# EAGLE board controll_8motor_dac (EAGLE 9.3.2)
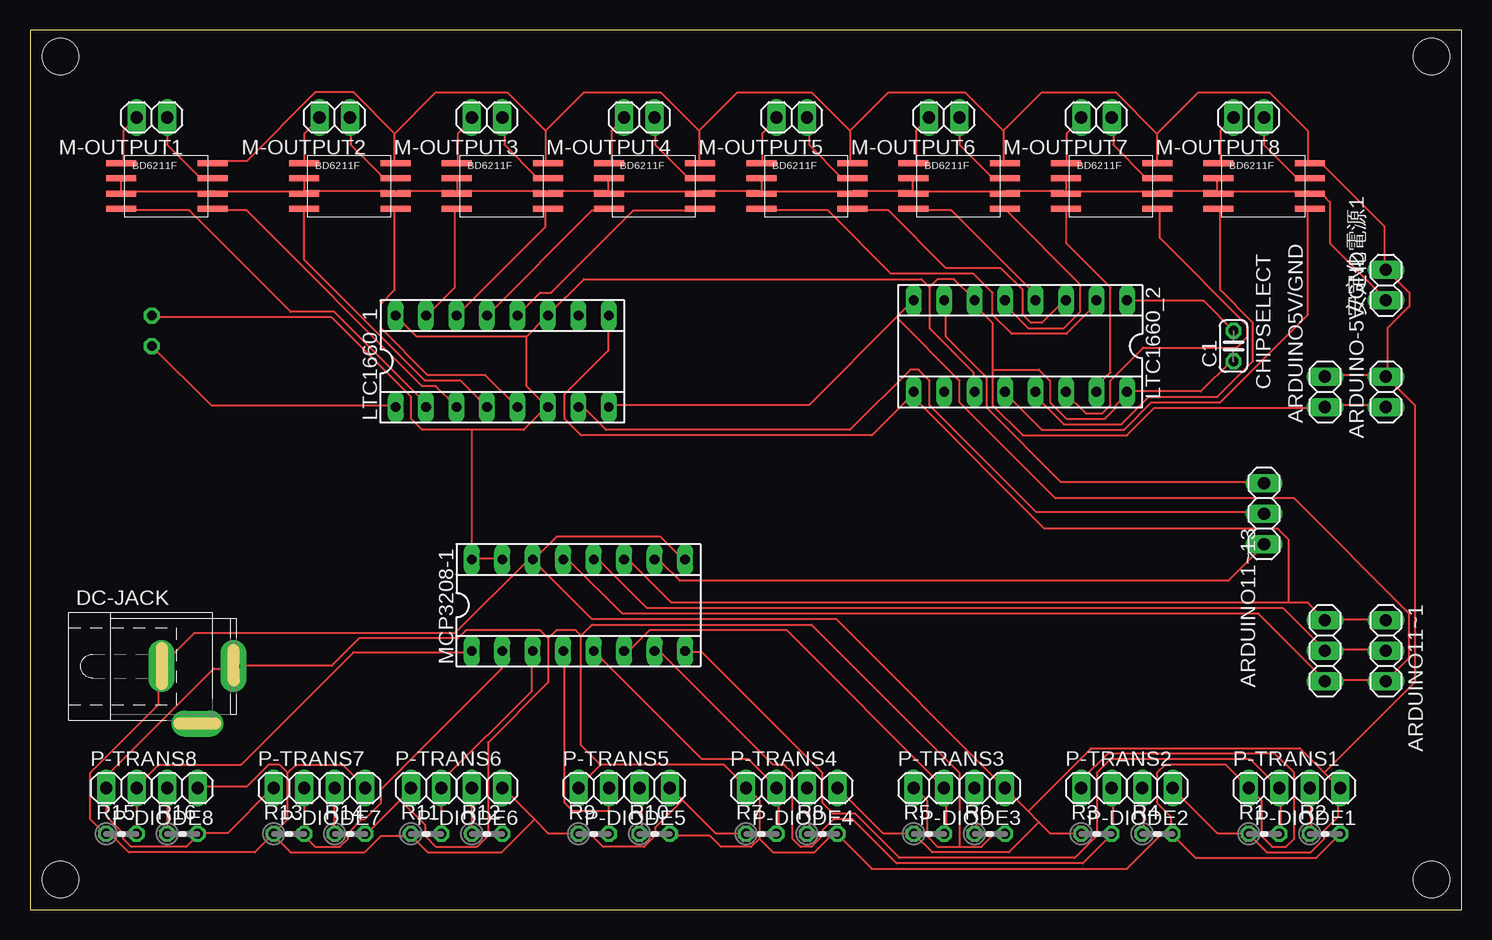
[diagram p0: board, top side]
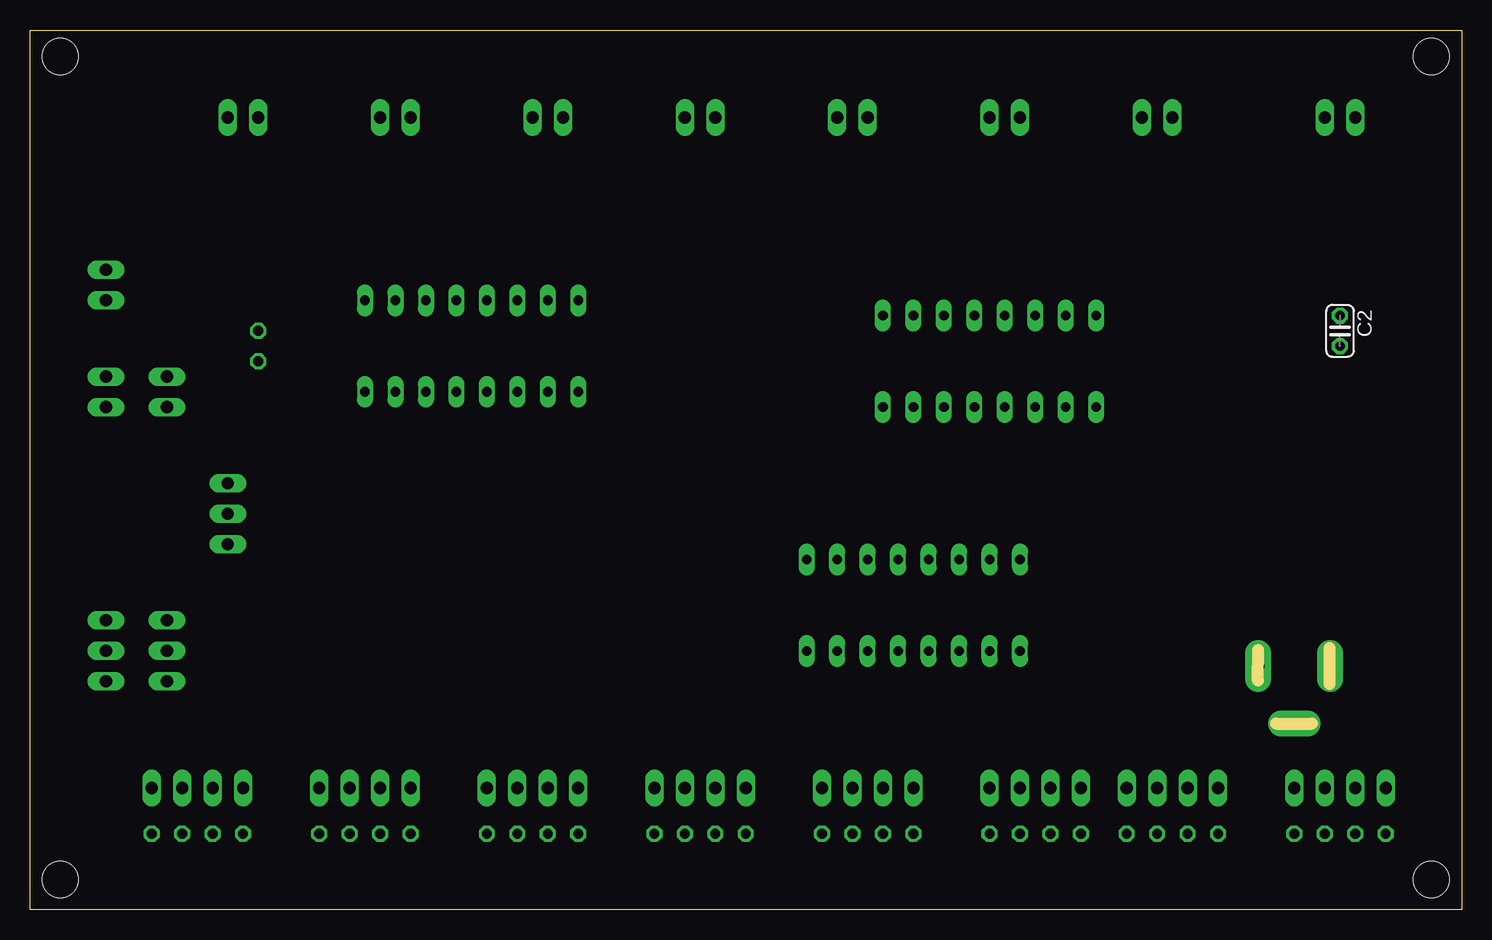
[diagram p1: board, bottom side, seen from below]

Size 119.36 x 73.33 mm. Coordinates in mm from the lower left corner, seen from the top.
Outline: 0,0 119.36,0 119.36,73.33 0,73.33 0,0
Copper layers (1*16): Top 0.035mm / dielectric 1.5mm / Bottom 0.035mm
Design rules "default_12mil": minimum track width 6mil, minimum drill 0.35mm, track to track 12mil, track to pad 12mil, pad to pad 12mil, via to via 12mil, smd to smd 12mil, copper to edge 40mil, drill to drill 6mil, minimum pad ring 10mil, minimum via ring 8mil, stop-mask expansion 4mil, vias tented up to drill 0mil, thermal gap 12mil
Net classes: 0 default: clearance 0.205 mm
Holes 3 mm at 2.54,71.12 116.84,71.12 116.84,2.54 2.54,2.54

## Footprints (pad centres in the part's own frame; a part is rotated, then mirrored left to right if it is on the bottom)
1X02 = drill 1.016 long: 1 -1.27,0; 2 1.27,0
1X03 = drill 1.016 long: 1 -2.54,0; 2 0,0; 3 2.54,0
C025-024X044 = drill 0.813 octagon: 1 -1.27,0; 2 1.27,0
SPC4077 = drill 0.8 pad 2.184 long: 1 -3,0; 2 0,-4.8 | drill 1 pad 2.184 long: 3 3,0
SOCKET-16 = drill 0.813 long: 1 -8.89,-3.81; 2 -6.35,-3.81; 3 -3.81,-3.81; 4 -1.27,-3.81; 5 1.27,-3.81; 6 3.81,-3.81; 7 6.35,-3.81; 8 8.89,-3.81; 9 8.89,3.81; 10 6.35,3.81; 11 3.81,3.81; 12 1.27,3.81; 13 -1.27,3.81; 14 -3.81,3.81; 15 -6.35,3.81; 16 -8.89,3.81
BD6211F-E2 = smd 2.5 x 0.5: 1 -2.54,2.54; 2 -2.54,1.27; 3 -2.54,0; 4 -2.54,-1.27; 5 5.07,-1.27; 6 5.07,0; 7 5.07,1.27; 8 5.07,2.54
0204V = drill 0.813 octagon: 1 -1.27,0; 2 1.27,0

## Placement (x,y rotation side)
ARDUINO5V/GND  [1X02]  107.95,43.18 90 top
ARDUINO11~1  [1X03]  113.03,21.59 270 top
ARDUINO11~13  [1X03]  107.95,21.59 270 top
ARDUINO-5V/GND  [1X02]  113.03,43.18 90 top
C1  0.1uF  [C025-024X044]  100.33,46.99 90 top
C2  0.1uF  [C025-024X044]  10.16,48.26 270 bottom
CHIPSELECT  [1X03]  102.87,33.02 270 top
DC-JACK  [SPC4077]  13.97,20.32 0 top
LTC1660_1  [SOCKET-16]  39.37,45.72 0 top
LTC1660_2  [SOCKET-16]  82.55,46.99 180 top
M-DRIVER_1  BD6211F-E2  [BD6211F-E2]  10.16,59.69 0 top
M-DRIVER_2  BD6211F-E2  [BD6211F-E2]  25.4,59.69 0 top
M-DRIVER_3  BD6211F-E2  [BD6211F-E2]  38.1,59.69 0 top
M-DRIVER_4  BD6211F-E2  [BD6211F-E2]  50.8,59.69 0 top
M-DRIVER_5  BD6211F-E2  [BD6211F-E2]  63.5,59.69 0 top
M-DRIVER_6  BD6211F-E2  [BD6211F-E2]  76.2,59.69 0 top
M-DRIVER_7  BD6211F-E2  [BD6211F-E2]  88.9,59.69 0 top
M-DRIVER_8  BD6211F-E2  [BD6211F-E2]  101.6,59.69 0 top
M-OUTPUT1  [1X02]  10.16,66.04 180 top
M-OUTPUT2  [1X02]  25.4,66.04 180 top
M-OUTPUT3  [1X02]  38.1,66.04 180 top
M-OUTPUT4  [1X02]  50.8,66.04 180 top
M-OUTPUT5  [1X02]  63.5,66.04 180 top
M-OUTPUT6  [1X02]  76.2,66.04 180 top
M-OUTPUT7  [1X02]  88.9,66.04 180 top
M-OUTPUT8  [1X02]  101.6,66.04 180 top
MCP3208‐1  [SOCKET-16]  45.72,25.4 0 top
P-DIODE1  [1X02]  107.95,10.16 180 top
P-DIODE2  [1X02]  93.98,10.16 180 top
P-DIODE3  [1X02]  80.01,10.16 180 top
P-DIODE4  [1X02]  66.04,10.16 180 top
P-DIODE5  [1X02]  52.07,10.16 180 top
P-DIODE6  [1X02]  38.1,10.16 180 top
P-DIODE7  [1X02]  26.67,10.16 180 top
P-DIODE8  [1X02]  12.7,10.16 180 top
P-TRANS1  [1X02]  102.87,10.16 0 top
P-TRANS2  [1X02]  88.9,10.16 0 top
P-TRANS3  [1X02]  74.93,10.16 0 top
P-TRANS4  [1X02]  60.96,10.16 0 top
P-TRANS5  [1X02]  46.99,10.16 0 top
P-TRANS6  [1X02]  33.02,10.16 0 top
P-TRANS7  [1X02]  21.59,10.16 0 top
P-TRANS8  [1X02]  7.62,10.16 0 top
R1  2.2K  [0204V]  102.87,6.35 0 top
R2  240  [0204V]  107.95,6.35 0 top
R3  2.2K  [0204V]  88.9,6.35 0 top
R4  240  [0204V]  93.98,6.35 0 top
R5  2.2K  [0204V]  74.93,6.35 0 top
R6  240  [0204V]  80.01,6.35 0 top
R7  2.2K  [0204V]  60.96,6.35 0 top
R8  240  [0204V]  66.04,6.35 0 top
R9  2.2K  [0204V]  46.99,6.35 0 top
R10  240  [0204V]  52.07,6.35 0 top
R11  2.2K  [0204V]  33.02,6.35 0 top
R12  240  [0204V]  38.1,6.35 0 top
R13  2.2K  [0204V]  21.59,6.35 0 top
R14  240  [0204V]  26.67,6.35 0 top
R15  2.2K  [0204V]  7.62,6.35 0 top
R16  240  [0204V]  12.7,6.35 0 top
安定化電源1  [1X02]  113.03,52.07 90 top

## Library data of the parts
ARDUINO5V/GND ARDUINO11~1 ARDUINO11~13 ARDUINO-5V/GND CHIPSELECT M-OUTPUT1-M-OUTPUT8 P-DIODE1-P-DIODE8 P-TRANS1-P-TRANS8 安定化電源1 = pinhead
C1 C2 = rcl; SPICEPREFIX: C
DC-JACK = BD6211F; OC_FARNELL: unknown; OC_NEWARK: unknown
LTC1660_1 LTC1660_2 MCP3208‐1 = ic-package
M-DRIVER_1-M-DRIVER_8 = BD6211F
R1-R16 = rcl; SPICEPREFIX: R

## Nets
ARDUINO-5V/GND: ARDUINO5V/GND.1 ARDUINO-5V/GND.1 C1.1 C2.1 LTC1660_1.6 LTC1660_1.11 LTC1660_1.16 LTC1660_2.6 LTC1660_2.11 LTC1660_2.16 MCP3208‐1.15 MCP3208‐1.16
N$1: LTC1660_1.12 M-DRIVER_4.5
N$2: M-DRIVER_4.1 M-OUTPUT4.2
N$3: LTC1660_1.13 M-DRIVER_4.4
N$4: LTC1660_1.15 M-DRIVER_3.4
N$5: LTC1660_2.12 M-DRIVER_8.5
N$6: LTC1660_2.13 M-DRIVER_8.4
N$7: LTC1660_2.14 M-DRIVER_7.5
N$8: LTC1660_2.15 M-DRIVER_7.4
N$9: LTC1660_1.5 M-DRIVER_2.5
N$10: LTC1660_1.4 M-DRIVER_2.4
N$11: LTC1660_1.3 M-DRIVER_1.5
N$12: LTC1660_1.2 M-DRIVER_1.4
N$13: M-DRIVER_5.1 M-OUTPUT5.2
N$14: LTC1660_2.4 M-DRIVER_6.4
N$15: LTC1660_2.3 M-DRIVER_5.5
N$16: LTC1660_2.2 M-DRIVER_5.4
N$17: M-DRIVER_4.7 M-OUTPUT4.1
N$18: M-DRIVER_3.7 M-OUTPUT3.1
N$19: M-DRIVER_3.1 M-OUTPUT3.2
N$20: M-DRIVER_8.7 M-OUTPUT8.1
N$21: M-DRIVER_8.1 M-OUTPUT8.2
N$22: M-DRIVER_7.7 M-OUTPUT7.1
N$23: M-DRIVER_7.1 M-OUTPUT7.2
N$24: M-DRIVER_1.7 M-OUTPUT1.1
N$25: ARDUINO11~1.1 ARDUINO11~13.1 LTC1660_1.9 LTC1660_2.9 MCP3208‐1.11
N$26: LTC1660_1.14 M-DRIVER_3.5
N$27: M-DRIVER_2.7 M-OUTPUT2.1
N$28: M-DRIVER_2.1 M-OUTPUT2.2
N$29: LTC1660_2.5 M-DRIVER_6.5
N$30: M-DRIVER_5.7 M-OUTPUT5.1
N$31: M-DRIVER_6.1 M-OUTPUT6.2
N$32: M-DRIVER_6.7 M-OUTPUT6.1
N$33: M-DRIVER_1.2 M-DRIVER_1.3 M-DRIVER_1.6 M-DRIVER_2.2 M-DRIVER_2.3 M-DRIVER_2.6 M-DRIVER_3.2 M-DRIVER_3.3 M-DRIVER_3.6 M-DRIVER_4.2 M-DRIVER_4.3 M-DRIVER_4.6 M-DRIVER_5.2 M-DRIVER_5.3 M-DRIVER_5.6 M-DRIVER_6.2 M-DRIVER_6.3 M-DRIVER_6.6 M-DRIVER_7.2 M-DRIVER_7.3 M-DRIVER_7.6 M-DRIVER_8.2 M-DRIVER_8.3 M-DRIVER_8.6 安定化電源1.1
N$34: C2.2 LTC1660_1.1
N$35: C1.2 LTC1660_2.1
N$38: ARDUINO11~1.3 ARDUINO11~13.3 LTC1660_1.8 LTC1660_2.8 MCP3208‐1.13
N$39: CHIPSELECT.2 LTC1660_1.7
N$40: M-DRIVER_1.1 M-OUTPUT1.2
N$41: CHIPSELECT.1 LTC1660_2.7
N$42: ARDUINO11~1.2 ARDUINO11~13.2 MCP3208‐1.12
N$43: P-DIODE8.2 R16.1
N$44: CHIPSELECT.3 MCP3208‐1.10
N$45: P-DIODE7.2 R14.1
N$46: P-DIODE6.2 R12.1
N$47: P-DIODE5.2 R10.1
N$48: P-DIODE4.2 R8.1
N$49: P-DIODE3.2 R6.1
N$50: P-DIODE2.2 R4.1
N$51: P-DIODE1.2 R2.1
N$52: MCP3208‐1.7 P-TRANS2.2 R3.2
N$53: MCP3208‐1.8 P-TRANS1.2 R1.2
N$54: MCP3208‐1.6 P-TRANS3.2 R5.2
N$55: MCP3208‐1.5 P-TRANS4.2 R7.2
N$56: MCP3208‐1.4 P-TRANS5.2 R9.2
N$57: MCP3208‐1.3 P-TRANS6.2 R11.2
N$58: MCP3208‐1.2 P-TRANS7.2 R13.2
N$59: MCP3208‐1.1 P-TRANS8.2 R15.2
N$97: DC-JACK.3 P-TRANS1.1 P-TRANS2.1 P-TRANS3.1 P-TRANS4.1 P-TRANS5.1 P-TRANS6.1 P-TRANS7.1 P-TRANS8.1 R2.2 R4.2 R6.2 R8.2 R10.2 R12.2 R14.2 R16.2
P-DIORD1: ARDUINO5V/GND.2 ARDUINO-5V/GND.2 DC-JACK.1 M-DRIVER_1.8 M-DRIVER_2.8 M-DRIVER_3.8 M-DRIVER_4.8 M-DRIVER_5.8 M-DRIVER_6.8 M-DRIVER_7.8 M-DRIVER_8.8 MCP3208‐1.9 MCP3208‐1.14 P-DIODE1.1 P-DIODE2.1 P-DIODE3.1 P-DIODE4.1 P-DIODE5.1 P-DIODE6.1 P-DIODE7.1 P-DIODE8.1 R1.1 R3.1 R5.1 R7.1 R9.1 R11.1 R13.1 R15.1 安定化電源1.2

## Tracks (layer width: path | path; a pad name or v marks a point on that pad's centre or on a via)
ARDUINO-5V/GND
  Top 0.152: C1.1 100.13,45.72 97.61,43.2 91.44,43.2 LTC1660_2.16 91.44,42.98 90.53,42.06 90.53,41.83 89.61,40.92 86.41,40.92 85.04,42.29 85.04,44.12 84.12,45.03 80.24,45.03 | ARDUINO-5V/GND.1 112.93,42.06 108.1,42.06 ARDUINO5V/GND.1 107.87,41.83 93.73,41.83 91.44,39.55 82.75,39.55 80.24,42.06 80.24,45.03 | 74.98,51.89 74.98,48.46 78.64,44.81 78.64,43.2 LTC1660_2.11 | 74.98,51.89 75.67,52.58 77.04,52.58 78.64,50.98 LTC1660_2.6 78.87,50.75 78.87,50.29 80.24,48.92 80.24,45.03 | LTC1660_1.16 32.23,47.78 41.38,47.78 | 41.38,47.78 42.98,49.38 LTC1660_1.11 43.2,49.61 46.18,52.58 74.3,52.58 74.98,51.89 | MCP3208‐1.15 39.32,29.26 37.03,29.26 MCP3208‐1.16 36.8,29.26 36.8,40.01 | 36.8,40.01 41.15,40.01 42.98,41.83 LTC1660_1.6 42.98,42.06 41.38,43.66 41.38,47.78 | 36.8,40.01 32.69,40.01 31.77,40.92 31.77,42.75 25.15,49.38 10.29,49.38 C2.1
N$1
  Top 0.152: M-DRIVER_4.5 55.78,58.29 50.29,58.29 43.43,51.44 42.52,51.44 40.69,49.61 LTC1660_1.12
N$2
  Top 0.152: M-DRIVER_4.1 48.46,62.41 48.46,64.92 49.38,65.84 M-OUTPUT4.2
N$3
  Top 0.152: LTC1660_1.13 46.86,58.29 48.23,58.29 M-DRIVER_4.4
N$4
  Top 0.152: M-DRIVER_3.4 35.43,58.29 35.43,51.89 33.15,49.61 LTC1660_1.15
N$5
  Top 0.152: M-DRIVER_8.5 106.53,58.29 106.53,49.61 99.21,42.29 93.5,42.29 91.21,40.01 84.35,40.01 81.38,42.98 LTC1660_2.12
N$6
  Top 0.152: M-DRIVER_8.4 99.21,58.29 99.21,51.66 101.96,48.92 101.96,45.72 98.98,42.75 93.27,42.75 90.98,40.46 86.18,40.46 83.67,42.98 LTC1660_2.13
N$7
  Top 0.152: M-DRIVER_7.5 94.18,58.29 94.18,56.01 101.5,48.69 101.5,47.78 100.58,46.86 92.81,46.86 90.07,44.12 90.07,42.06 89.38,41.38 88.01,41.38 86.41,42.98 LTC1660_2.14
N$8
  Top 0.152: M-DRIVER_7.4 86.41,58.29 86.41,55.55 90.07,51.89 90.07,44.81 88.92,43.66 88.92,43.2 LTC1660_2.15
N$9
  Top 0.152: M-DRIVER_2.5 30.4,58.29 30.4,51.66 29.26,50.52 29.26,48.46 33.15,44.58 37.95,44.58 40.46,42.06 LTC1660_1.5
N$10
  Top 0.152: M-DRIVER_2.4 22.86,54.18 32.92,44.12 35.89,44.12 LTC1660_1.4
N$11
  Top 0.152: M-DRIVER_1.5 15.32,58.29 18.06,58.29 32.69,43.66 33.83,43.66 35.43,42.06 LTC1660_1.3
N$12
  Top 0.152: M-DRIVER_1.4 7.77,58.29 13.26,58.29 21.72,49.84 25.38,49.84 33.15,42.06 LTC1660_1.2
N$13
  Top 0.152: M-DRIVER_5.1 61.04,62.41 61.04,64.69 62.18,65.84 M-OUTPUT5.2
N$14
  Top 0.152: M-DRIVER_6.4 73.84,58.29 76.81,58.29 83.67,51.44 83.67,50.98 LTC1660_2.4
N$15
  Top 0.152: M-DRIVER_5.5 68.58,58.29 71.55,58.29 76.35,53.49 80.92,53.49 82.75,51.66 82.75,49.61 83.44,48.92 84.35,48.92 86.18,50.75 LTC1660_2.3
N$16
  Top 0.152: M-DRIVER_5.4 61.04,58.29 66.52,58.29 71.78,53.03 78.64,53.03 80.24,51.44 80.24,49.61 81.84,48.01 86.41,48.01 88.7,50.29 88.7,50.75 LTC1660_2.2
N$17
  Top 0.152: M-DRIVER_4.7 55.78,61.04 54.86,61.04 52.12,63.78 52.12,65.84 M-OUTPUT4.1
N$18
  Top 0.152: M-DRIVER_3.7 42.98,61.04 42.29,61.04 39.55,63.78 39.55,65.84 M-OUTPUT3.1
N$19
  Top 0.152: M-DRIVER_3.1 35.66,62.41 35.66,64.69 36.8,65.84 M-OUTPUT3.2
N$20
  Top 0.152: M-OUTPUT8.1 102.87,63.78 105.61,61.04 106.53,61.04 M-DRIVER_8.7
N$21
  Top 0.152: M-OUTPUT8.2 99.21,64.92 99.21,62.41 M-DRIVER_8.1
N$22
  Top 0.152: M-DRIVER_7.7 93.95,61.04 93.04,61.04 90.3,63.78 90.3,65.84 M-OUTPUT7.1
N$23
  Top 0.152: M-DRIVER_7.1 86.41,62.41 86.41,64.69 87.55,65.84 M-OUTPUT7.2
N$24
  Top 0.152: M-OUTPUT1.1 11.43,63.78 14.17,61.04 15.09,61.04 M-DRIVER_1.7
N$25
  Top 0.152: LTC1660_1.9 48.23,49.38 48.23,46.63 44.58,42.98 44.58,40.92 45.95,39.55 70.18,39.55 73.61,42.98 LTC1660_2.9 73.84,42.98 73.84,42.52 84.58,31.77 104.01,31.77 104.93,30.86 104.93,25.6 | 104.93,25.6 106.53,25.6 107.9,24.23 ARDUINO11~13.1 108.13,24.23 112.93,24.23 ARDUINO11~1.1 | 104.93,25.6 53.49,25.6 50.06,29.03 49.61,29.03 MCP3208‐1.11
N$26
  Top 0.152: M-DRIVER_3.5 42.98,58.29 42.98,56.92 35.66,49.61 LTC1660_1.14
N$27
  Top 0.152: M-DRIVER_2.7 30.4,61.04 29.49,61.04 26.75,63.78 26.75,65.84 M-OUTPUT2.1
N$28
  Top 0.152: M-DRIVER_2.1 22.86,64.69 24,65.84 M-OUTPUT2.2
N$29
  Top 0.152: M-DRIVER_6.5 81.38,58.29 87.55,52.12 87.55,49.84 86.18,48.46 83.21,48.46 81.38,50.29 81.38,50.75 LTC1660_2.5
N$30
  Top 0.152: M-DRIVER_5.7 68.35,61.04 67.67,61.04 64.92,63.78 64.92,65.84 M-OUTPUT5.1
N$31
  Top 0.152: M-DRIVER_6.1 73.84,62.41 73.84,64.92 74.75,65.84 M-OUTPUT6.2
N$32
  Top 0.152: M-DRIVER_6.7 81.15,61.04 80.24,61.04 77.5,63.78 77.5,65.84 M-OUTPUT6.1
N$33
  Top 0.152: 98.98,59.89 94.18,59.89 M-DRIVER_7.6 93.95,59.89 86.41,59.89 | 98.98,59.89 98.98,60.81 M-DRIVER_8.2 | 98.98,59.89 M-DRIVER_8.3 99.21,59.89 106.53,59.89 M-DRIVER_8.6 106.76,59.66 107.67,59.66 108.36,58.98 108.36,55.55 112.93,50.98 安定化電源1.1 | M-DRIVER_2.2 22.86,59.89 | M-DRIVER_1.2 7.54,60.81 7.54,59.89 M-DRIVER_1.3 7.77,59.89 15.09,59.89 M-DRIVER_1.6 15.32,59.89 22.86,59.89 | 86.41,59.89 86.41,60.81 M-DRIVER_7.2 | 73.61,59.89 68.58,59.89 M-DRIVER_5.6 68.35,59.89 61.04,59.89 | 73.61,59.89 73.61,60.81 M-DRIVER_6.2 | 73.61,59.89 M-DRIVER_6.3 73.84,59.89 81.15,59.89 M-DRIVER_6.6 81.38,59.89 86.18,59.89 M-DRIVER_7.3 86.41,59.89 | 61.04,59.89 61.04,60.81 M-DRIVER_5.2 | 35.66,59.89 35.66,60.81 M-DRIVER_3.2 | 48.23,59.89 43.2,59.89 M-DRIVER_3.6 42.98,59.89 35.66,59.89 | 48.23,59.89 48.23,60.81 M-DRIVER_4.2 | 48.23,59.89 M-DRIVER_4.3 48.46,59.89 55.78,59.89 M-DRIVER_4.6 56.01,59.89 60.81,59.89 M-DRIVER_5.3 61.04,59.89 | 35.66,59.89 M-DRIVER_3.3 35.43,59.89 30.63,59.89 M-DRIVER_2.6 30.4,59.89 22.86,59.89 | 22.86,59.89 M-DRIVER_2.3
N$34
  Top 0.152: C2.2 15.09,42.06 30.4,42.06 LTC1660_1.1
N$35
  Top 0.152: C1.2 97.84,50.75 91.44,50.75 LTC1660_2.1
N$38
  Top 0.152: LTC1660_2.8 72.24,49.38 | 72.24,49.38 64.92,42.06 48.46,42.06 LTC1660_1.8 | MCP3208‐1.13 44.58,29.03 45.03,29.03 49.38,24.69 102.41,24.69 107.9,19.2 ARDUINO11~13.3 108.13,19.2 112.93,19.2 ARDUINO11~1.3 113.16,19.2 114.99,21.03 114.99,24.69 105.39,34.29 85.5,34.29 77.5,42.29 77.5,44.12 72.24,49.38
N$39
  Top 0.152: LTC1660_1.7 45.72,41.83 46.18,41.83 48.01,40.01 68.35,40.01 73.38,45.03 74.07,45.03 74.98,44.12 74.98,42.06 83.9,33.15 102.87,33.15 CHIPSELECT.2
N$40
  Top 0.152: M-OUTPUT1.2 7.77,64.92 7.77,62.41 M-DRIVER_1.1
N$41
  Top 0.152: LTC1660_2.7 76.35,50.75 76.35,47.78 79.78,44.35 79.78,41.83 85.95,35.66 102.87,35.66 CHIPSELECT.1
N$42
  Top 0.152: MCP3208‐1.12 47.09,29.03 47.55,29.03 51.44,25.15 104.47,25.15 107.9,21.72 ARDUINO11~13.2 108.13,21.72 112.93,21.72 ARDUINO11~1.2
N$43
  Top 0.152: P-DIODE8.2 R16.1
N$44
  Top 0.152: MCP3208‐1.10 52.12,29.03 52.58,29.03 54.18,27.43 99.9,27.43 102.87,30.4 CHIPSELECT.3
N$45
  Top 0.152: R14.1 25.38,6.4 25.38,10.06 P-DIODE7.2
N$46
  Top 0.152: R12.1 36.8,6.4 36.8,10.06 P-DIODE6.2
N$47
  Top 0.152: R10.1 50.98,6.4 50.98,10.06 P-DIODE5.2
N$48
  Top 0.152: R8.1 64.92,6.4 64.92,10.06 P-DIODE4.2
N$49
  Top 0.152: R6.1 78.87,6.4 78.87,10.06 P-DIODE3.2
N$50
  Top 0.152: R4.1 92.81,6.4 92.81,10.06 P-DIODE2.2
N$51
  Top 0.152: R2.1 106.76,6.4 106.76,10.06 P-DIODE1.2
N$52
  Top 0.152: MCP3208‐1.7 52.12,21.49 52.58,21.49 61.95,12.12 62.87,12.12 63.55,11.43 63.55,5.94 64.24,5.26 65.15,5.26 66.06,6.17 66.06,6.63 66.98,7.54 68.58,7.54 72.24,3.89 87.78,3.89 90.07,6.17 R3.2 90.3,6.4 90.3,10.06 P-TRANS2.2
N$53
  Top 0.152: R1.2 104.24,6.4 104.24,10.06 P-TRANS1.2 101.73,12.57 90.07,12.57 88.92,11.43 88.92,6.17 87.1,4.34 72.47,4.34 68.81,8 66.98,8 66.06,8.91 66.06,11.43 56.01,21.49 54.63,21.49 MCP3208‐1.8
N$54
  Top 0.152: R5.2 76.35,6.4 76.35,10.06 P-TRANS3.2 76.12,10.29 63.09,23.32 51.66,23.32 50.06,21.72 49.61,21.72 MCP3208‐1.6
N$55
  Top 0.152: MCP3208‐1.5 56.01,12.57 59.89,12.57 62.18,10.29 P-TRANS4.2 62.41,10.06 62.41,6.4 R7.2
N$56
  Top 0.152: 48.23,8.23 48.23,10.06 P-TRANS5.2 | 48.23,8.23 48.23,6.4 R9.2 | 48.23,8.23 45.26,8.23 44.58,8.91 44.58,21.49 MCP3208‐1.4
N$57
  Top 0.152: R11.2 P-TRANS6.2 34.29,10.74 41.83,18.29 41.83,21.49 MCP3208‐1.3
N$58
  Top 0.152: P-TRANS7.2 R13.2 22.86,6.17 23.77,5.26 25.83,5.26 26.52,5.94 26.52,6.4 27.66,7.54 27.89,7.54 29.26,8.91 29.26,10.06 39.32,20.12 39.32,21.49 MCP3208‐1.2
N$59
  Top 0.152: R15.2 8.91,6.4 8.91,10.06 P-TRANS8.2 8.91,10.29 10.74,12.12 17.6,12.12 26.98,21.49 36.8,21.49 MCP3208‐1.1
N$97
  Top 0.152: P-TRANS7.1 20.12,10.06 16.46,6.4 14.17,6.4 R16.2 13.95,6.17 13.03,5.26 8.46,5.26 7.77,5.94 7.77,6.4 6.4,7.77 6.4,10.06 P-TRANS8.1 6.4,10.29 6.4,11.2 15.32,20.12 16.92,20.12 DC-JACK.3 17.14,20.34 25.15,20.34 27.43,22.63 35.66,22.63 36.35,23.32 42.52,23.32 43.2,22.63 | R4.2 95.1,6.4 95.1,7.77 93.95,8.91 93.95,11.43 94.64,12.12 99.67,12.12 101.5,10.29 P-TRANS1.1 101.73,10.06 102.64,9.14 102.64,6.17 103.56,5.26 104.7,5.26 105.39,5.94 105.39,11.43 103.78,13.03 89.84,13.03 87.78,10.97 87.78,10.29 P-TRANS2.1 | R2.2 107.21,4.34 97.16,4.34 95.33,6.17 R4.2 | 30.86,9.14 31.77,10.06 P-TRANS6.1 | 30.86,9.14 28.12,6.4 R14.2 | 38.18,6.17 39.32,6.17 R12.2 | 38.18,6.17 37.26,5.26 33.83,5.26 32.92,6.17 32.92,7.09 30.86,9.14 | 77.5,5.26 75.67,5.26 74.75,6.17 74.75,9.14 73.84,10.06 P-TRANS3.1 | 77.5,5.26 79.32,5.26 80.24,6.17 81.15,6.17 R6.2 | 60.81,5.94 60.12,5.26 57.61,5.26 56.69,6.17 53.49,6.17 R10.2 | 60.81,5.94 60.81,9.14 59.89,10.06 P-TRANS4.1 59.66,10.29 57.84,12.12 47.55,12.12 | 60.81,5.94 61.95,4.8 65.38,4.8 66.75,6.17 67.21,6.17 R8.2 67.44,6.17 70.18,3.43 91.44,3.43 94.18,6.17 95.1,6.17 R4.2 | 47.55,12.12 45.72,10.29 P-TRANS5.1 | 77.5,5.26 77.5,11.43 65.15,23.77 46.86,23.77 45.95,22.86 | 45.95,22.86 45.95,13.72 47.55,12.12 | 38.18,6.17 38.18,13.95 43.2,18.97 43.2,22.63 | 43.2,22.63 43.89,23.32 45.49,23.32 45.95,22.86
P-DIORD1
  Top 0.152: 42.06,7.54 39.55,10.06 P-DIODE6.1 | 42.06,7.54 43.2,6.4 45.72,6.4 R9.1 45.72,6.17 46.86,6.17 47.78,5.26 51.21,5.26 52.12,6.17 52.12,6.86 54.41,9.14 | 54.41,9.14 53.49,10.06 P-DIODE5.1 | 54.41,9.14 57.15,6.4 59.66,6.4 R7.1 | MCP3208‐1.14 42.06,29.26 43.89,31.09 52.58,31.09 54.41,29.26 MCP3208‐1.9 | R13.1 20.12,6.17 18.75,4.8 8.23,4.8 6.86,6.17 6.4,6.17 R15.1 6.17,6.4 5.03,7.54 5.03,11.43 10.74,17.14 10.74,20.12 DC-JACK.1 10.97,20.34 13.72,23.09 35.43,23.09 41.38,29.03 41.83,29.03 MCP3208‐1.14 | R13.1 20.34,6.17 21.72,4.8 27.89,4.8 29.26,6.17 31.55,6.17 R11.1 31.77,6.17 33.15,4.8 39.32,4.8 42.06,7.54 | 21.49,11.43 20.8,12.12 19.89,12.12 18.06,10.29 14.17,10.29 P-DIODE8.1 | 21.49,11.43 21.49,7.54 20.34,6.4 R13.1 | 21.49,11.43 22.17,12.12 26.06,12.12 27.89,10.29 P-DIODE7.1 | P-DIODE2.1 95.33,10.06 98.98,6.4 101.5,6.4 R1.1 101.73,6.17 103.1,4.8 106.76,4.8 107.9,5.94 107.9,6.63 109.04,7.77 109.04,10.06 P-DIODE1.1 109.04,10.29 107.9,11.43 | P-DIODE4.1 67.44,10.06 71.09,6.4 73.61,6.4 R5.1 75.21,4.8 81.61,4.8 84.12,7.32 | 83.21,8.23 P-DIODE3.1 67.21,24.23 46.86,24.23 42.06,29.03 MCP3208‐1.14 | 83.21,8.23 84.12,7.32 | 84.12,7.32 85.04,6.4 87.55,6.4 R3.1 | 107.9,11.43 105.84,13.49 88.47,13.49 83.21,8.23 | ARDUINO5V/GND.2 108.1,44.58 112.93,44.58 ARDUINO-5V/GND.2 | ARDUINO-5V/GND.2 113.16,44.58 113.16,48.46 114.99,50.29 114.99,51.44 113.16,53.26 安定化電源1.2 112.93,53.49 112.93,56.92 107.67,62.18 106.76,62.18 M-DRIVER_8.8 106.53,62.41 106.53,64.92 103.33,68.12 97.38,68.12 93.95,64.69 | 30.4,64.69 26.98,68.12 23.77,68.12 18.06,62.41 15.32,62.41 M-DRIVER_1.8
  Top 0.152: 30.4,64.69 30.4,62.41 M-DRIVER_2.8 | 42.98,64.92 42.98,62.41 M-DRIVER_3.8 | 42.98,64.92 39.78,68.12 33.83,68.12 30.4,64.69 | 55.78,64.92 55.78,62.41 M-DRIVER_4.8 | 55.78,64.92 52.58,68.12 46.18,68.12 42.98,64.92 | 68.35,64.92 68.35,62.41 M-DRIVER_5.8 | 68.35,64.92 65.15,68.12 58.98,68.12 55.78,64.92 | 81.15,64.92 81.15,62.41 M-DRIVER_6.8 | 81.15,64.92 77.95,68.12 71.55,68.12 68.35,64.92 | 93.95,64.69 93.95,62.41 M-DRIVER_7.8 | 93.95,64.69 90.53,68.12 84.35,68.12 81.15,64.92 | 107.9,11.43 115.44,18.97 115.44,42.06 113.16,44.35 ARDUINO-5V/GND.2